# Altium PCB PCB_Indicator_V2.PcbDoc
Units mm, origin at the board's own origin, x right, y up, seen from the top; angles counter-clockwise.
Board outline 40 x 29 mm, 2 copper layers (Top Layer, Bottom Layer); 24 components, 56 nets, 70 pads, 0 vias.
Unrouted connection lines stored in the file: 6.
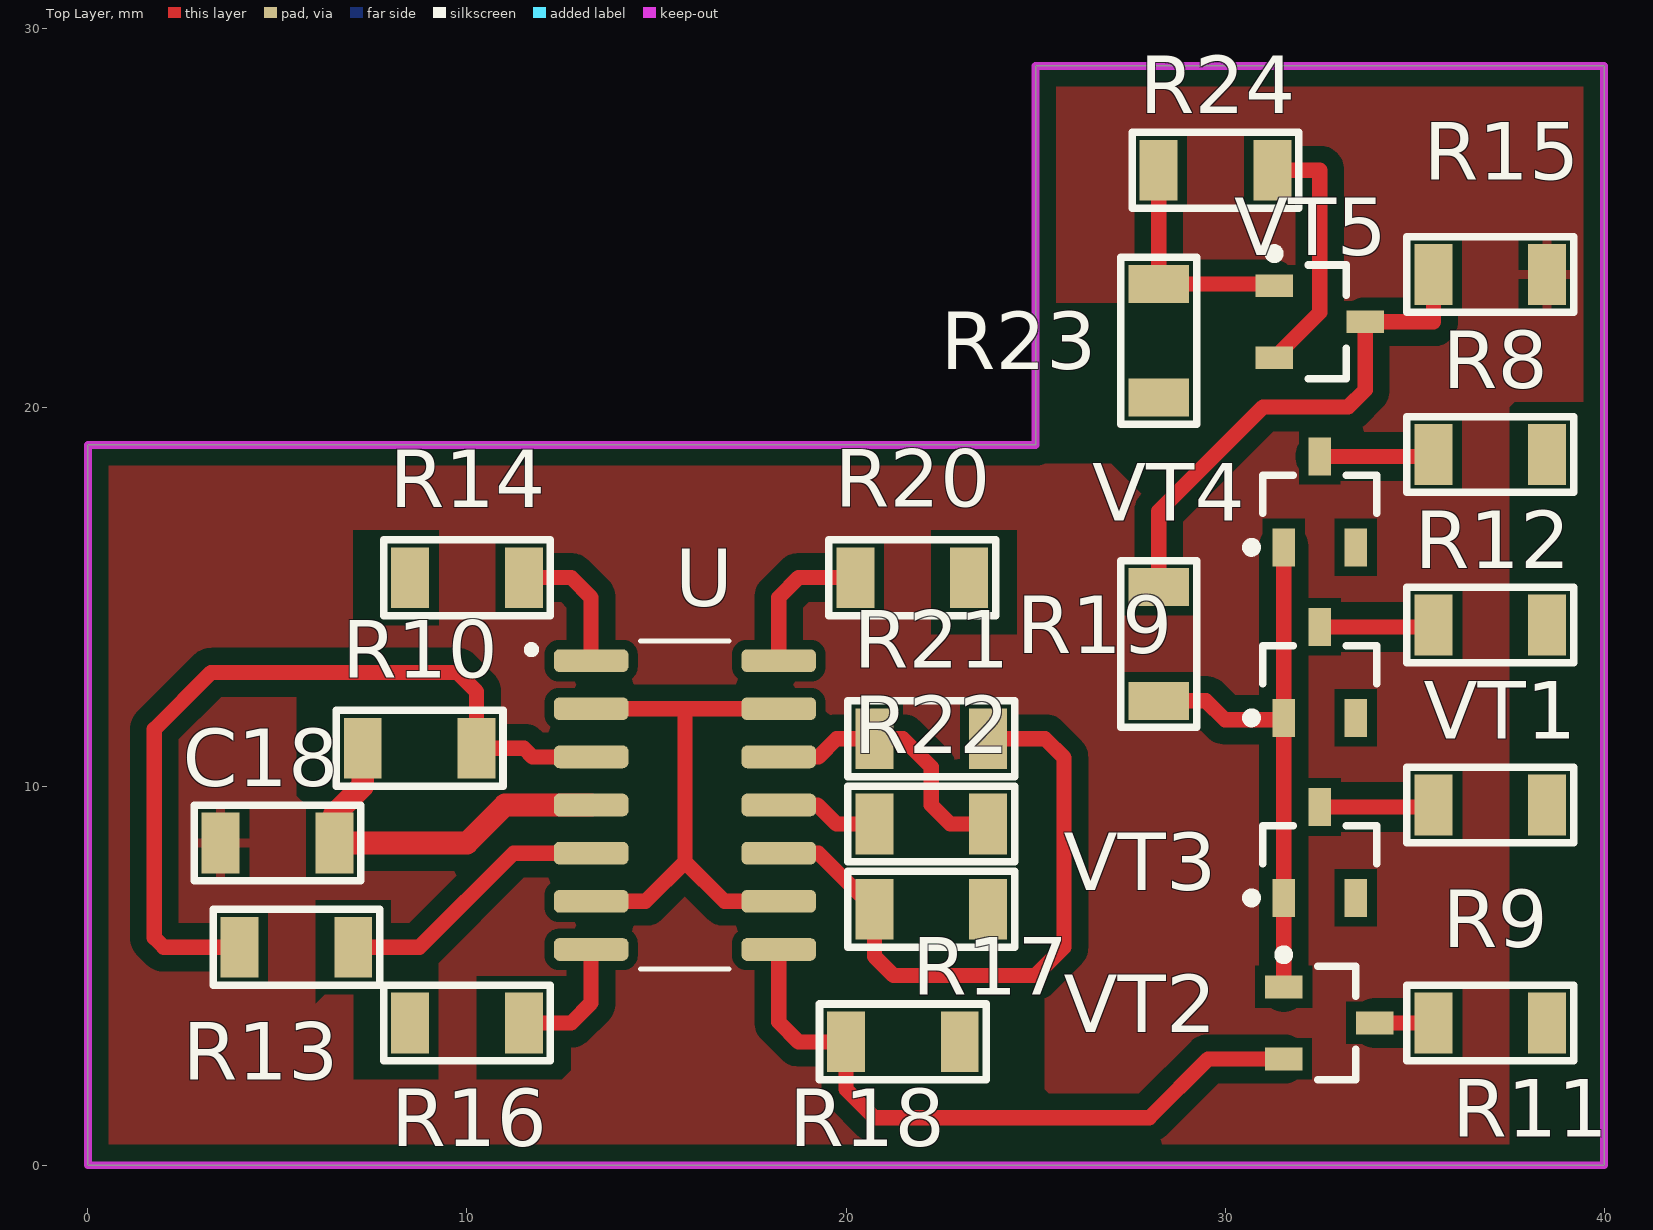
[diagram p0: Top Layer view]
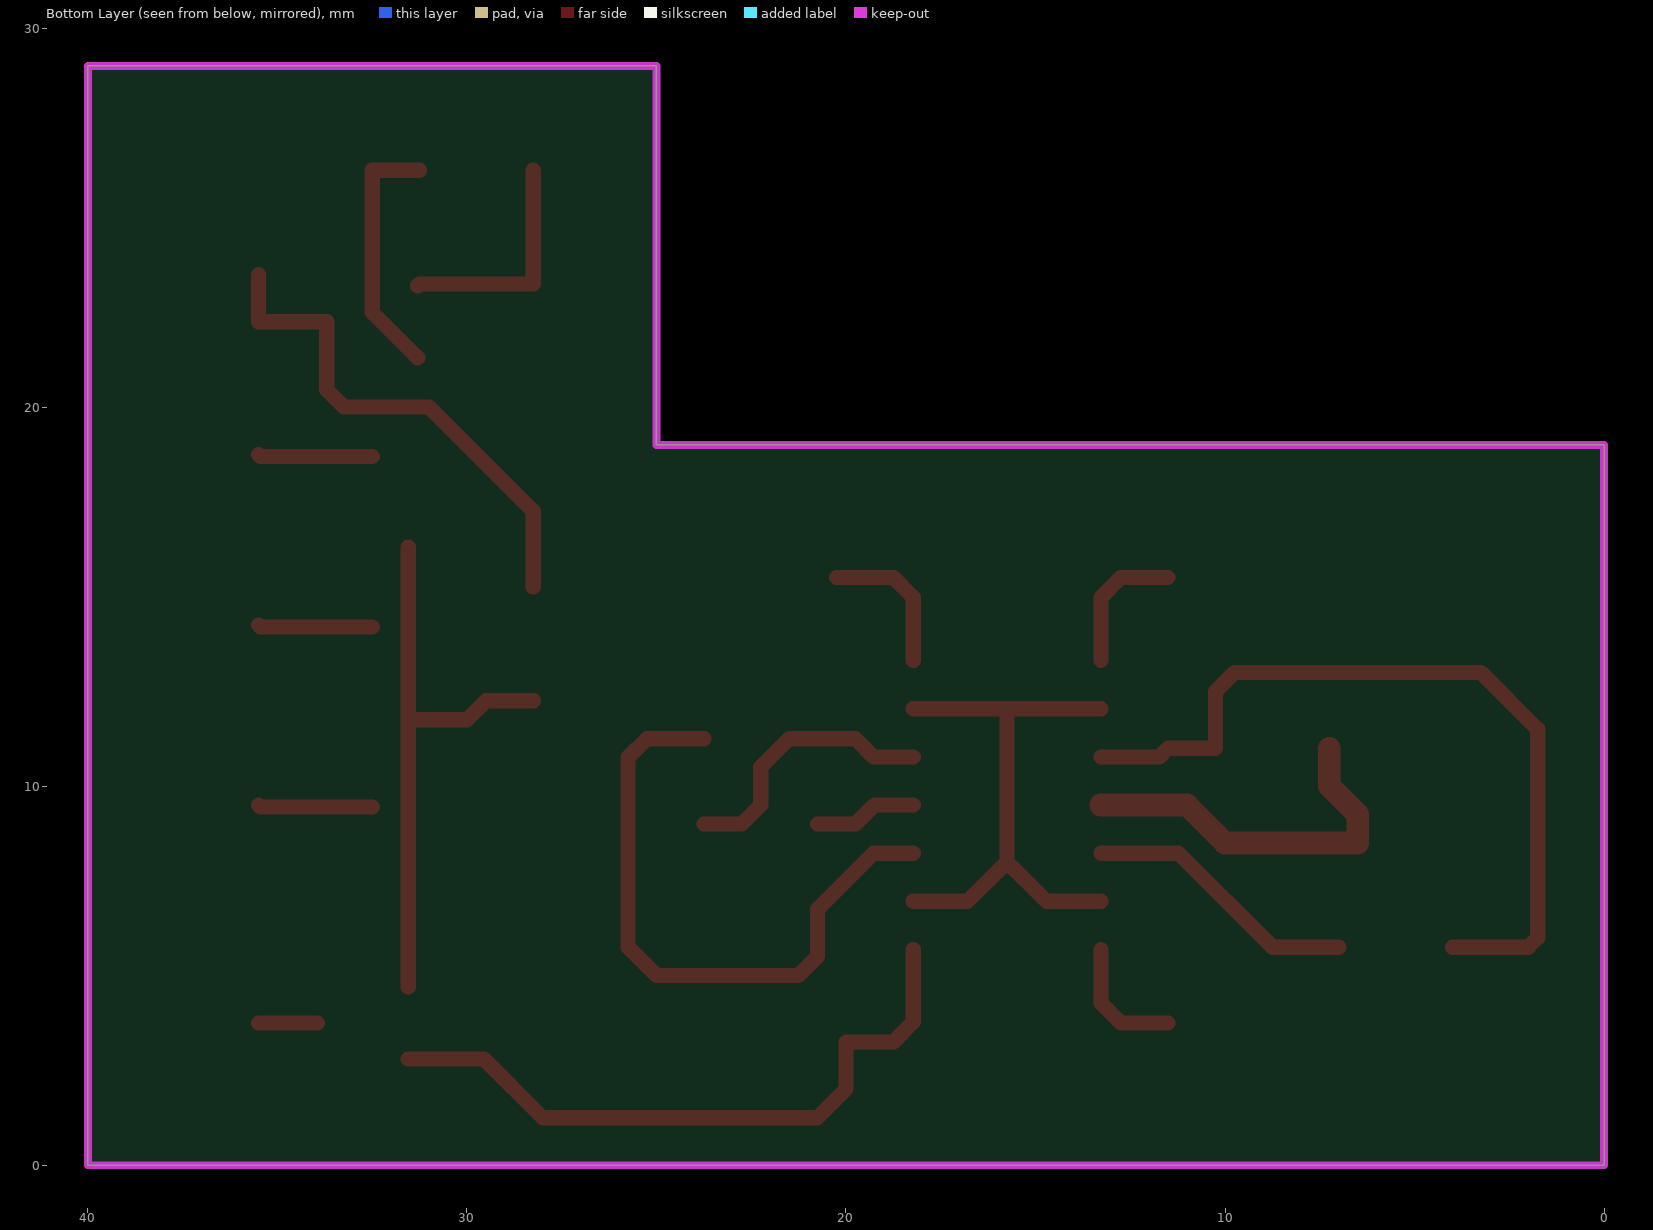
[diagram p1: Bottom Layer view, seen from below]
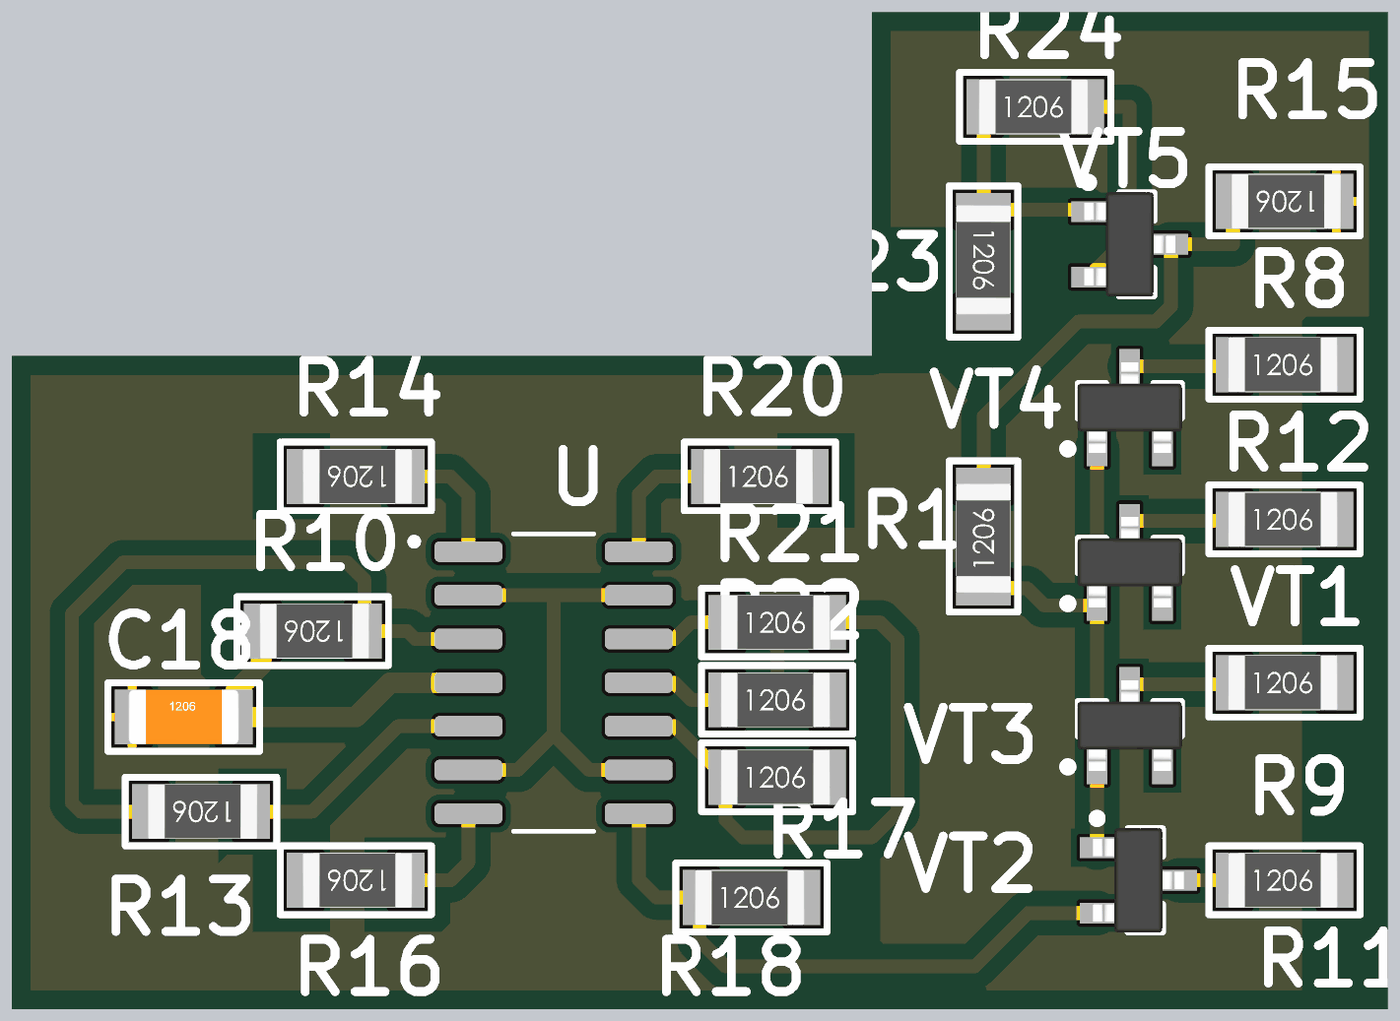
[diagram p2: 3D render of the assembled board from above, using the file's embedded part models]

## Layer stack, top to bottom
Top Solder: solder mask 0.0102, Solder Resist, Dk 3.5
Top Layer: signal copper 0.0356
Dielectric 1: dielectric 0.32, FR-4, Dk 4.8
Bottom Layer: signal copper 0.0356
Bottom Solder: solder mask 0.0102, Solder Resist, Dk 3.5

## Board outline
0,0 0,19 25,19 25,29 40,29 40,0

## Design rules (kind name [scope] priority, off if disabled: settings)
Clearance [All] p1: gap=0.254 ignorepadtopadclearanceinfootprint=TRUE except(0: Arc-Hole Track-Hole SMDPad-Hole THPad-Hole Via-Hole Fill-Hole Poly-Hole Region-Hole Text-Hole; 0.45: Arc-Fill Arc-Poly Arc-Region Track-Fill Track-Poly Track-Region)
PolygonConnect [All] p1: connectstyle=Relief reliefconductorwidth=0.254 reliefentries=4 polygonreliefangle="90 Angle" airgapwidth=0.254
RoutingVias [All] p1: holewidth=0.711 width=1.27 viastyle="Through Hole" minholewidth=0.711 minwidth=1.27 maxholewidth=0.711 maxwidth=1.27
SolderMaskExpansion [All] p1: expansion=0.102
Width [All] p1: maxlimit=0.6 minlimit=0.254 preferedwidth=0.4
30 further rules are at their usual default settings.

## Classes and differential pairs
component class SchemeP1: U5 U6 U12

## Components (designator, comment, footprint, x,y, rotation, side; value= is the part's Value field where it differs from the comment)
C18 "Ceramic capacitor, 0.1μF, X7R, ±10%, 50V, 1206, -55...+125°C" "CAP: 1206" 5,8.5 r0 top value=0.1?F
R8 "Resistor film, 1.5k, ±5%, 1206, 0.25W, -55...+125°C" "RES: 1206" 37,18.75 r0 top value=1.5k
R9 "Resistor film, 1.5k, ±5%, 1206, 0.25W, -55...+125°C" "RES: 1206" 37,9.5 r0 top value=1.5k
R10 "Resistor film, 11k, ±5%, 1206, 0.25W, -55...+125°C" "RES: 1206" 8.75,11 r180 top value=11k
R11 "Resistor film, 1.5k, ±5%, 1206, 0.25W, -55...+125°C" "RES: 1206" 37,3.75 r0 top value=1.5k
R12 "Resistor film, 1.5k, ±5%, 1206, 0.25W, -55...+125°C" "RES: 1206" 37,14.25 r0 top value=1.5k
R13 "Resistor film, 2.4k, ±5%, 1206, 0.25W, -55...+125°C" "RES: 1206" 5.5,5.75 r180 top value=2.4k
R14 "Resistor film, 1.5k, ±5%, 1206, 0.25W, -55...+125°C" "RES: 1206" 10,15.5 r180 top value=1.5k
R15 "Resistor film, 10k, ±5%, 1206, 0.25W, -55...+125°C" "RES: 1206" 37,23.5 r180 top value=10k
R16 "Resistor film, 1.5k, ±5%, 1206, 0.25W, -55...+125°C" "RES: 1206" 10,3.75 r180 top value=1.5k
R17 "Resistor film, 2.2k, ±5%, 1206, 0.25W, -55...+125°C" "RES: 1206" 22.25,6.75 r0 top value=2.2k
R18 "Resistor film, 1.5k, ±5%, 1206, 0.25W, -55...+125°C" "RES: 1206" 21.5,3.25 r0 top value=1.5k
R19 "Resistor film, 1k, ±5%, 1206, 0.25W, -55...+125°C" "RES: 1206" 28.25,13.75 r90 top value=1k
R20 "Resistor film, 1.5k, ±5%, 1206, 0.25W, -55...+125°C" "RES: 1206" 21.75,15.5 r0 top value=1.5k
R21 "Resistor film, 9.1k, ±5%, 1206, 0.25W, -55...+125°C" "RES: 1206" 22.25,11.25 r0 top value=9.1k
R22 "Resistor film, 24k, ±5%, 1206, 0.25W, -55...+125°C" "RES: 1206" 22.25,9 r0 top value=24k
R23 "Resistor film, 3.3k, ±5%, 1206, 0.25W, -55...+125°C" "RES: 1206" 28.25,21.75 r270 top value=3.3k
R24 "Resistor film, 13k, ±5%, 1206, 0.25W, -55...+125°C" "RES: 1206" 29.75,26.25 r0 top value=13k
U "LM324DR" SOIC127P600X175-14N 15.75,9.5 r0 top
VT1 "*" SOT23_123 32.5,13 r90 top
VT2 "*" SOT23_123 32.75,3.75 r0 top
VT3 "*" SOT23_123 32.5,8.25 r90 top
VT4 "*" SOT23_123 32.5,17.5 r90 top
VT5 "*" SOT23_123 32.5,22.25 r0 top

## Footprints (in the part's own frame and the unit in brackets; to place one, negate y for a bottom-side part, rotate by r counter-clockwise, add the part's x,y. Pads: shape width x height; smd on the part's side, far side on the other; paste and mask are expansions set on the pad)
"CAP: 1206" [mm]
  rect 1x1.6 smd: 1(-1.5,0) 2(1.5,0)
  silkscreen extent -2.2,-1 2.2,1, body extent -1.6,-0.8 1.6,0.8, height 1
"RES: 1206" [mm]
  rect 1x1.6 smd: 1(-1.5,0) 2(1.5,0)
  silkscreen extent -2.2,-1 2.2,1, body extent -1.65,-0.8 1.55,0.8, height 0.47
SOIC127P600X175-14N [mm]
  rrect50% 1.97x0.6 smd: 1(-2.475,3.81) 2(-2.475,2.54) 3(-2.475,1.27) 4(-2.475,0) 5(-2.475,-1.27) 6(-2.475,-2.54) 7(-2.475,-3.81) 8(2.475,-3.81) 9(2.475,-2.54) 10(2.475,-1.27) 11(2.475,0) 12(2.475,1.27) 13(2.475,2.54) 14(2.475,3.81)
  silkscreen extent -4.15,-4.33 1.17,4.33
SOT23_123 [mm] "SOT23, 3-Leads, Body 3,0x2,6mm (max), Pitch 0,95mm, IPC Medium Density"
  rect 1x0.6 smd: 1(-1.2,0.95) 2(1.2,0) 3(-1.2,-0.95)
  round 0.5 on Mech1: ""(-0.9,1.1)
  silkscreen extent -1.32,-1.5 0.7,1.92, body extent -1.32,-1.52 1.32,1.52, height 1.12

## Part data
C18: library part Ceramic_1206, Manufacturer=Yageo, Package=1206, PartNumber=CC1206KRX7R9BB104, Temperature=-55...+125°C, Tolerance=±10%, TypeCapacitor="Ceramic capacitor", TypeDielectric=X7R, ValueManufacturerPartNumber="Ceramic capacitor, 0.1?F, X7R, ±10%, 50V, 1206, -55...+125°C", Voltage=50V, HelpURL=https://www.digikey.com/product-detail/en/yageo/CC1206KRX7R9BB104/311-1179-1-ND/303089
R8 R9 R10 R11 R12 R13 R14 R15 R16 R17 R18 R19 R20 R21 R22 R23 R24: library part Resistor_1206, Manufacturer=Yageo, Package=1206, PartNumber=RC1206JR-07100RL, Power=0.25W, Temperature=-55...+125°C, Tolerance=±5%, TypeResistor="Resistor film", HelpURL=https://www.digikey.com/product-detail/en/yageo/RC1206JR-07100RL/311-100ERCT-ND/732153
  R8 R9 R11 R12 R14 R16 R18 R20: ValueManufacturerPartNumber="Resistor film, 1.5k, ±5%, 1206, 0.25W, -55...+125°C"
  R10: ValueManufacturerPartNumber="Resistor film, 11k, ±5%, 1206, 0.25W, -55...+125°C"
  R13: ValueManufacturerPartNumber="Resistor film, 2.4k, ±5%, 1206, 0.25W, -55...+125°C"
  R15: ValueManufacturerPartNumber="Resistor film, 10k, ±5%, 1206, 0.25W, -55...+125°C"
  R17: ValueManufacturerPartNumber="Resistor film, 2.2k, ±5%, 1206, 0.25W, -55...+125°C"
  R19: ValueManufacturerPartNumber="Resistor film, 1k, ±5%, 1206, 0.25W, -55...+125°C"
  R21: ValueManufacturerPartNumber="Resistor film, 9.1k, ±5%, 1206, 0.25W, -55...+125°C"
  R22: ValueManufacturerPartNumber="Resistor film, 24k, ±5%, 1206, 0.25W, -55...+125°C"
  R23: ValueManufacturerPartNumber="Resistor film, 3.3k, ±5%, 1206, 0.25W, -55...+125°C"
  R24: ValueManufacturerPartNumber="Resistor film, 13k, ±5%, 1206, 0.25W, -55...+125°C"
U: "4-Channel industry standard operational amplifier 14-SOIC 0 to 70", Package="SOIC-14 Texas Instruments", Arrow_Electronics-Purchase-URL=https://snapeda.com/shop?store=Arrow+Electronics&id=1818, Availability=Good, DigiKey-Purchase-URL=https://snapeda.com/shop?store=DigiKey&id=1818, MF="Texas Instruments", Mouser-Purchase-URL=https://snapeda.com/shop?store=Mouser&id=1818, MP=LM324DR, Price=None, SnapEDA_Link=https://www.snapeda.com/parts/LM324DR/Texas%20Instruments/view-part/1818/?ref=snap, Texas_Instruments-Purchase-URL=https://snapeda.com/shop?store=Texas+Instruments&id=1818
VT1 VT2 VT3 VT4 VT5: library part NPN, "Bipolar"

## Nets (pads, with @x,y where several pads share a name; then routed paths per layer and width w, separated by ;. In a path a pad name is that pad's centre, name@x,y a point inside that pad or via, vN(x,y) a via of type N, cw(c..) or ccw(c..) an arc to the next point about the centre after c; other vN are vias at no path point)
1Hz_Wave: 
+3.3V: 
+5V: C18.2 R10.2 R24.2 U.4 VT5.3 | length 16.7
  Top Layer w0.4: R24.2 32.5,26.25 32.5,22.5 VT5.3
  Top Layer w0.6: R10.2 7.25,10 6.5,9.25 C18.2 10,8.5 11,9.5 U.4
CS: 
GND: C18.1 R15.1 R22.1 U.11 | length 2.7
  Top Layer w0.4: U.11 19.25,9.5 19.75,9 R22.1
I_IN: 
I_OUT: 
IN_SW: 
INPUT_SENS_PIN: 
MISO: 
MOSI: 
NetBT1_1: U.2 U.6 U.9 U.13 | length 14.8
  Top Layer w0.4: U.6 14.71,6.96 15.75,8 ; U.2 15.75,12.04 ; U.9 16.79,6.96 15.75,8 ; U.13 15.75,12.04 ; 15.75,8 15.75,12.04
NetBT1_2: 
NetC1_2: 
NetC2_2: 
NetC11_1: 
NetC15_1: 
NetR3_1: 
NetR4_1: 
NetR4_2: R23.2
NetR8_1: R8.1 VT4.2 | length 3
  Top Layer w0.4: VT4.2 35.45,18.7 R8.1
NetR8_2: R8.2
NetR9_1: R9.1 VT3.2 | length 3
  Top Layer w0.4: VT3.2 35.45,9.45 R9.1
NetR9_2: R9.2
NetR10_1: R10.1 R13.2 U.3 | length 21.8
  Top Layer w0.4: R13.2 2,5.75 1.75,6 1.75,11.5 3.25,13 9.75,13 10.25,12.5 R10.1 11.5,11 11.73,10.77 U.3
NetR11_1: R11.1 VT2.2 | length 1.6
  Top Layer w0.4: VT2.2 R11.1
NetR11_2: R11.2
NetR12_1: R12.1 VT1.2 | length 3
  Top Layer w0.4: VT1.2 35.45,14.2 R12.1
NetR12_2: R12.2
NetR13_1: R13.1 R17.2 U.5 | length 7.3
  Top Layer w0.4: R13.1 8.75,5.75 11.23,8.23 U.5
NetR14_1: R14.1 U.1 VT4.3 | length 3.7
  Top Layer w0.4: R14.1 12.75,15.5 13.275,14.975 U.1
NetR14_2: R14.2
NetR15_2: R15.2 R19.2 VT5.2 | length 13.6
  Top Layer w0.4: R19.2 28.25,17.25 31,20 33.25,20 33.7,20.45 VT5.2 35.5,22.25 R15.2
NetR16_1: R16.1 U.7 VT3.3 | length 3.4
  Top Layer w0.4: R16.1 12.75,3.75 13.275,4.275 U.7
NetR16_2: R16.2
NetR17_1: R17.1 R21.2 U.10 | length 17.1
  Top Layer w0.4: U.10 19.27,8.23 R17.1 20.75,5.5 21.25,5 25,5 25.75,5.75 25.75,10.75 25.25,11.25 R21.2
NetR18_1: R18.1 U.8 VT2.3 | length 17.7
  Top Layer w0.4: U.8 18.225,3.775 18.75,3.25 R18.1 20,2 20.75,1.25 28,1.25 29.55,2.8 VT2.3
NetR18_2: R18.2
NetR19_1: R19.1 VT1.1 VT2.1 VT3.1 VT4.1 | length 15.1
  Top Layer w0.4: R19.1 29.5,12.25 30,11.75 31.5,11.75 VT1.1 ; VT2.1 VT3.1 VT1.1 ; VT4.1 VT1.1
NetR20_1: R20.1 U.14 VT1.3 | length 3.9
  Top Layer w0.4: U.14 18.225,14.975 18.75,15.5 R20.1
NetR20_2: R20.2
NetR21_1: R21.1 R22.2 U.12 | length 7.2
  Top Layer w0.4: U.12 19.27,10.77 19.75,11.25 R21.1 21.5,11.25 22.25,10.5 22.25,9.5 22.75,9 R22.2
NetR23_1: R23.1 R24.1 VT5.1 | length 6.1
  Top Layer w0.4: R24.1 R23.1 31.25,23.25 VT5.1
NetSB1_1: 
NetSB1_2: 
NetU3_1: 
NetU7_1: 
OUT_SW: 
RESET: 
SCK: 
SCL: 
SCL_OLED: 
SDA: 
SDA_OLED: 
SW_BTN: 
Uin: 
pads on no net: VT1. VT2. VT3. VT4. VT5.

## Polygon pours and split planes (outlines as drawn)
GND on Top Layer "TL" (solid, remove dead copper, pour order 0): 25,29 40,29 40,0 0,0 0,19 25,19

## Keep-outs
Keep-Out Layer:
  the board outline again, w0.2

## Other copper
Top Layer:
  pour cut-out: 10.5,10 10.438,10 9.688,9.25 6,9.25 5.5,9.75 5.5,12.5 10,12.5
  pour cut-out: 22.25,4.5 22.25,1.5 25.25,1.5 25.5,1.75 25.25,2 25.25,4.75
  pour cut-out: 23,5.5 23,8.5 22.189,9.311 21.627,9.311 21.627,9.373 21.5,9.5 21.25,9.25 21.25,5.75
  pour cut-out: 39.449,20.143 37.643,20.143 37.5,20 37.5,0.25 39.75,0.25
  pour cut-out: 30,19.75 30.25,19.75 32,21.5 31.75,21.75 31.75,22.75 25.25,22.75 25.239,22.739 25.239,18.504 26.996,18.504 28,17.5
  pour cut-out: 9.25,16.75 9.25,14.25 7,14.25 7,16.75
  pour cut-out: 22.25,16.75 22.25,14 24.5,14 24.5,16.75
  pour cut-out: 9.305,5.385 9.25,5.33 9.25,2.25 7,2.25 7,5.5
  pour cut-out: 8,6.25 8,7 6,7 6,4.25 6.25,4.5 7.75,4.5
  pour cut-out: 12.75,5 10.25,5 10.25,2.25 12.5,2.25 12.75,2.5